# EAGLE board deflectorshield (EAGLE 7.7.0)
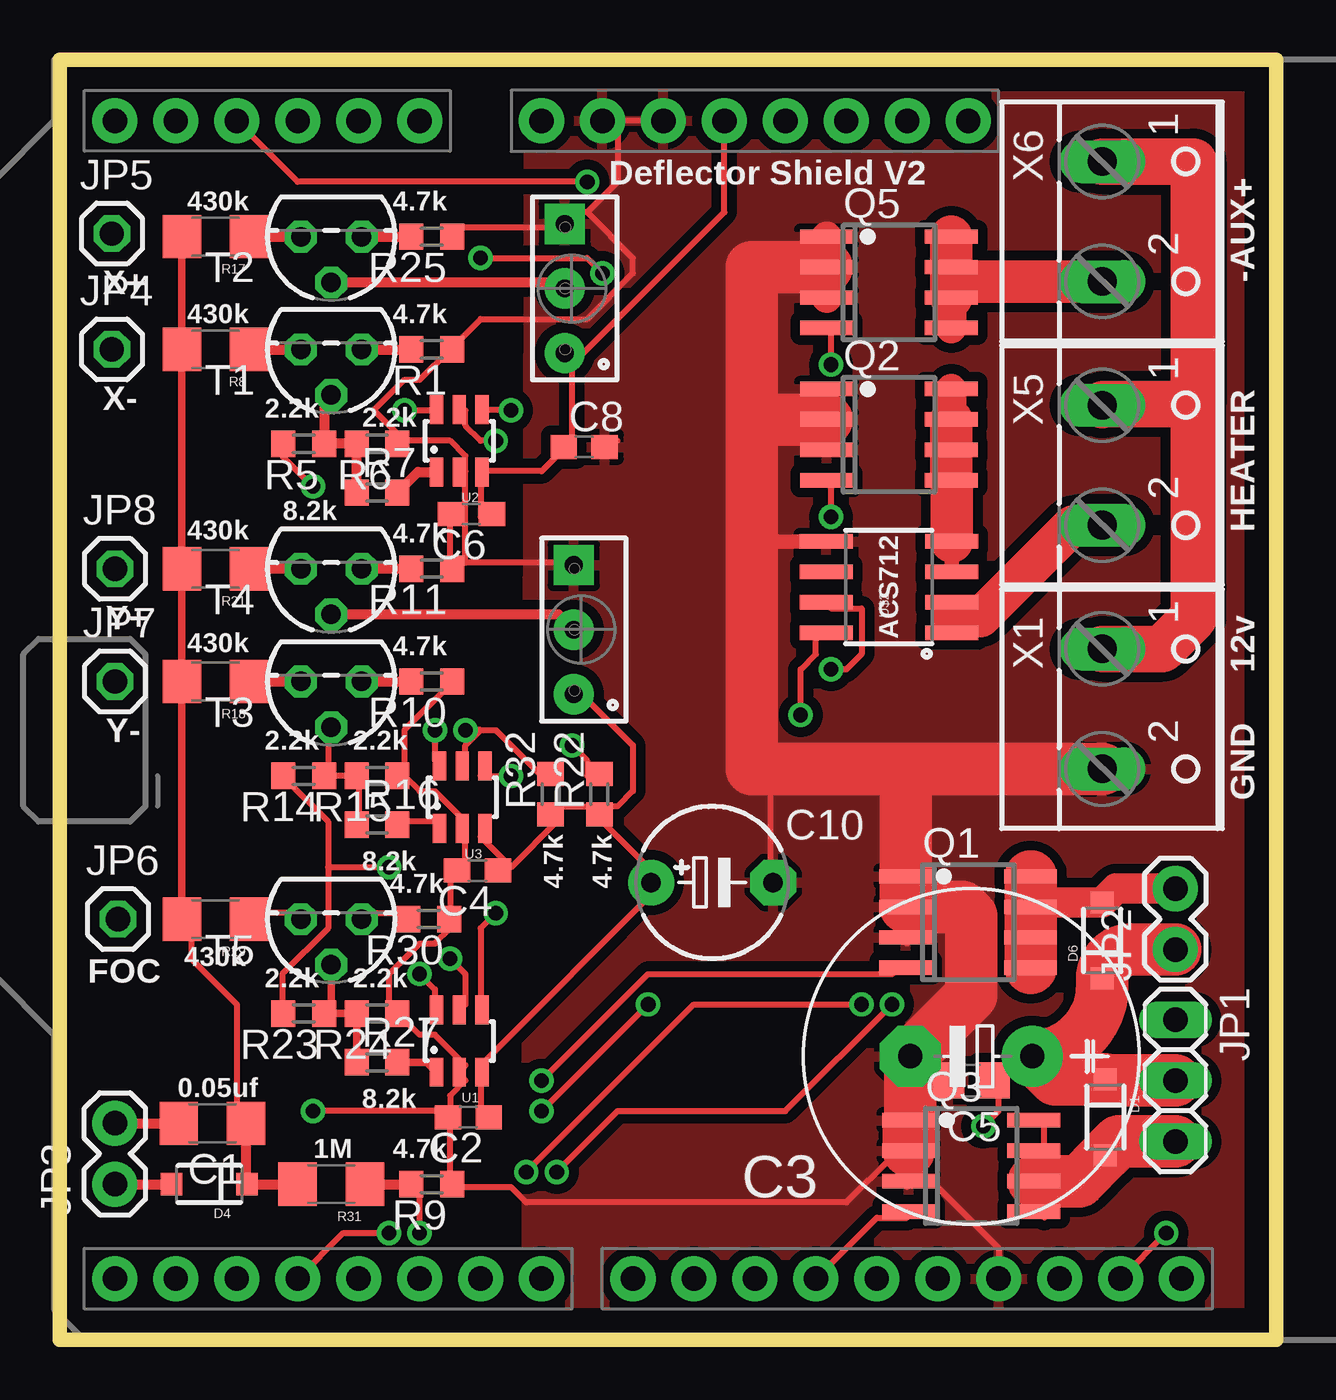
[diagram p0: board, top side]
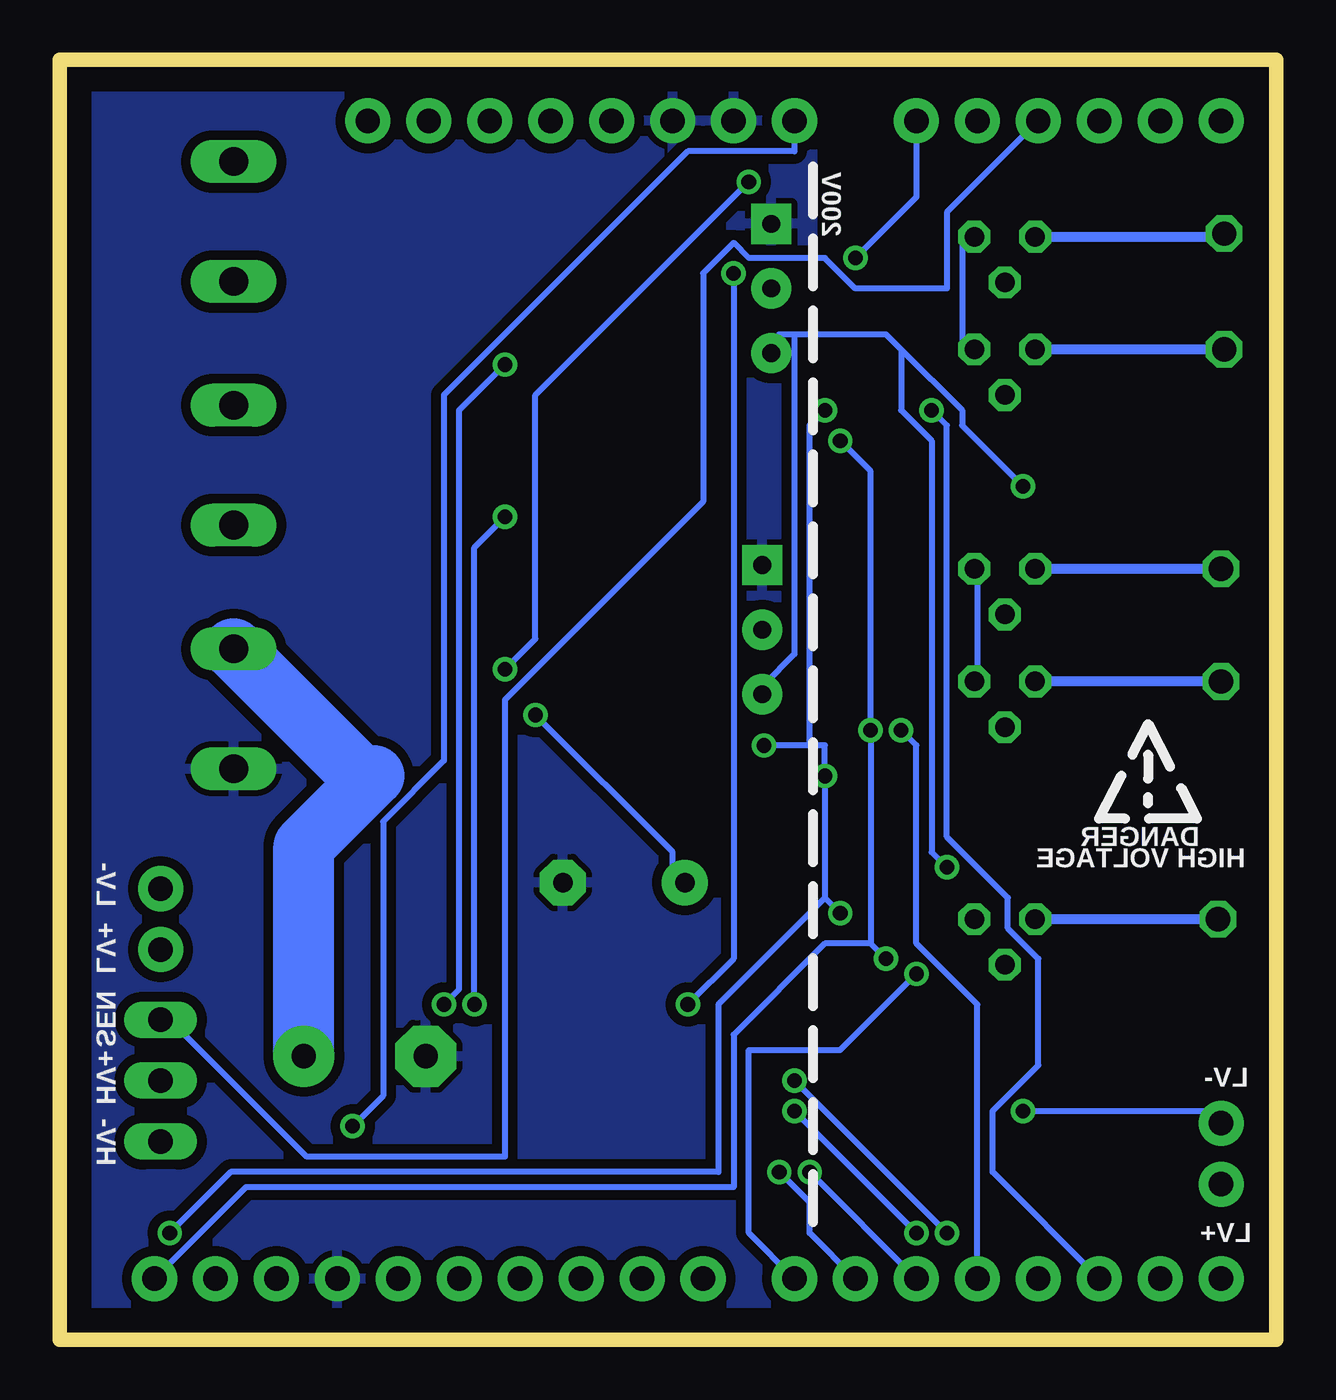
[diagram p1: board, bottom side, seen from below]

Size 50.67 x 53.34 mm. Coordinates in mm from the lower left corner, seen from the top.
Outline: 0,53.34 0,0 50.67,0 50.67,53.34 0,53.34
Copper layers (1*16): Top 0.035mm / dielectric 1.5mm / Bottom 0.035mm
Design rules "default": minimum track width 10mil, minimum drill 24mil, track to track 8mil, track to pad 8mil, pad to pad 8mil, via to via 8mil, smd to smd 8mil, copper to edge 40mil, drill to drill 8mil, minimum pad ring 10mil, minimum via ring 8mil, stop-mask expansion 4mil, vias tented up to drill 0mil, thermal gap 10mil
Net classes: 1 med: width 0.254 mm, clearance 1.27 mm; 2 hv: width 0.254 mm, clearance 3.81 mm

## Footprints (pad centres in the part's own frame; a part is rotated, then mirrored left to right if it is on the bottom)
C1206 = smd 1.6 x 1.8: 1 -1.4,0; 2 1.4,0
C0603 = smd 1.1 x 1: 1 -0.85,0; 2 0.85,0
E5-13 = drill 1.016 pad 2.54: + -2.54,0 | drill 1.016 pad 2.54 octagon: - 2.54,0
C0805 = smd 1.3 x 1.5: 1 -0.95,0; 2 0.95,0
E5-6 = drill 0.813 pad 1.905: + -2.54,0 | drill 0.813 pad 1.905 octagon: - 2.54,0
SOD-123 = smd 0.9 x 0.95: A 1.575,0; C -1.575,0
UNO_R3_SHIELD_NOLABELS = drill 1.016 pad 1.88: 3.3V 50.8,26.67; 5V 50.8,29.21; A0 50.8,41.91; A1 50.8,44.45; A2 50.8,46.99; A3 50.8,49.53; A4 50.8,52.07; A5 50.8,54.61; AREF 2.54,15.24; D2 2.54,49.53; D3 2.54,46.99; D4 2.54,44.45; D5 2.54,41.91; D6 2.54,39.37; D7 2.54,36.83; D8 2.54,33.02; D9 2.54,30.48; D10 2.54,27.94; D11 2.54,25.4; D12 2.54,22.86; D13 2.54,20.32; GND@0 50.8,31.75; GND@1 50.8,34.29; GND@2 2.54,17.78; IOREF 50.8,21.59; NC 50.8,19.05; RES 50.8,24.13; RX 2.54,54.61; SCL 2.54,10.16; SDA 2.54,12.7; TX 2.54,52.07; VIN 50.8,36.83
1X03 = drill 1.016 long: 1 -2.54,0; 2 0,0; 3 2.54,0
1X02 = drill 1.016 pad 1.88: 1 0,0; 2 2.54,0
1X01 = drill 1.016 octagon: 1 0,0
SO-08 = smd 0.6 x 2.2: 1 -1.905,-2.6; 2 -0.635,-2.6; 3 0.635,-2.6; 4 1.905,-2.6; 5 1.905,2.6; 6 0.635,2.6; 7 -0.635,2.6; 8 -1.905,2.6
R0603 = smd 1 x 1.1: 1 -0.85,0; 2 0.85,0
TRIMPOT_PTH_S3_LOCK = drill 0.737 pad 1.676 square: 1 -2.692,-0.305 | drill 0.737 pad 1.676: 2 0,-0.305; 3 2.692,-0.305
1206 = smd 1.6 x 1.8: 1 -1.4,0; 2 1.4,0
TO92 = drill 0.813 octagon: 1 1.27,0; 2 0,1.905; 3 -1.27,0
SOT23-6 = smd 0.55 x 1.2: 1 0.95,1.3; 2 0,1.3; 3 -0.95,1.3; 4 -0.95,-1.3; 5 0,-1.3; 6 0.95,-1.3
SO08 = smd 0.61 x 2.21: 1 -1.905,-2.616; 2 -0.635,-2.616; 3 0.635,-2.616; 4 1.905,-2.616; 5 1.905,2.616; 6 0.635,2.616; 7 -0.635,2.616; 8 -1.905,2.616
W237-102 = drill 1.194 long: 1 -2.5,-1.27; 2 2.5,-1.27

## Placement (x,y rotation side)
C1  0.05uf  [C1206]  6.35,9.02 180 top
C2  [C0603]  17.02,9.27 180 top
C3  [E5-13]  37.97,11.81 180 top
C4  [C0603]  17.4,19.56 180 top
C5  [C0805]  37.97,10.79 180 top
C6  [C0603]  17.14,34.42 180 top
C8  [C0603]  21.84,37.21 0 top
C10  [E5-6]  27.18,19.05 0 top
D1  [SOD-123]  43.56,9.27 270 top
D4  [SOD-123]  6.22,6.48 180 top
D6  [SOD-123]  43.43,16.64 90 top
J1  ARDUINO_R3_SHIELDNOLABELS  [UNO_R3_SHIELD_NOLABELS]  56.9,0 90 top
JP1  [1X03]  46.48,10.79 270 top
JP2  [1X02]  46.48,16.26 90 top
JP3  [1X02]  2.29,6.48 90 top
JP4  [1X01]  2.16,41.27 0 top
JP5  [1X01]  2.16,46.1 0 top
JP6  [1X01]  2.41,17.53 0 top
JP7  [1X01]  2.29,27.43 0 top
JP8  [1X01]  2.29,32.13 0 top
Q1  [SO-08]  37.85,17.4 270 top
Q2  [SO-08]  34.54,37.72 270 top
Q3  [SO-08]  37.97,7.24 270 top
Q5  [SO-08]  34.54,44.07 270 top
R1  4.7k  [R0603]  15.49,41.27 180 top
R4  5k  [TRIMPOT_PTH_S3_LOCK]  21.34,43.82 270 top
R5  2.2k  [R0603]  10.16,37.34 180 top
R6  2.2k  [R0603]  13.21,37.34 180 top
R7  8.2k  [R0603]  13.21,35.31 0 top
R8  430k  [1206]  6.48,41.27 180 top
R9  4.7k  [R0603]  15.49,6.48 180 top
R10  4.7k  [R0603]  15.49,27.43 180 top
R11  4.7k  [R0603]  15.49,32.13 180 top
R13  5k  [TRIMPOT_PTH_S3_LOCK]  21.72,29.59 270 top
R14  2.2k  [R0603]  10.16,23.49 180 top
R15  2.2k  [R0603]  13.21,23.49 180 top
R16  8.2k  [R0603]  13.21,21.46 0 top
R17  430k  [1206]  6.48,45.97 180 top
R18  430k  [1206]  6.48,27.43 180 top
R21  430k  [1206]  6.48,32.13 180 top
R22  4.7k  [R0603]  22.48,22.73 90 top
R23  2.2k  [R0603]  10.16,13.59 180 top
R24  2.2k  [R0603]  13.21,13.59 180 top
R25  4.7k  [R0603]  15.49,45.97 180 top
R27  8.2k  [R0603]  13.21,11.56 0 top
R29  430k  [1206]  6.48,17.53 180 top
R30  4.7k  [R0603]  15.37,17.53 180 top
R31  1M  [1206]  11.3,6.48 180 top
R32  4.7k  [R0603]  20.45,22.73 90 top
T1  2N5088  [TO92]  11.3,41.27 180 top
T2  2N5088  [TO92]  11.3,45.97 180 top
T3  2N5088  [TO92]  11.3,27.43 180 top
T4  2N5088  [TO92]  11.3,32.13 180 top
T5  2N5088  [TO92]  11.3,17.53 180 top
U1  MCP4725  [SOT23-6]  16.64,12.45 180 top
U2  MCP4725  [SOT23-6]  16.64,37.47 180 top
U3  MCP4725  [SOT23-6]  16.76,22.61 180 top
U$2  ACS712  [SO08]  34.54,31.37 90 top
X1  [W237-102]  44.7,26.29 270 top
X5  [W237-102]  44.7,36.45 270 top
X6  [W237-102]  44.7,46.61 270 top

## Library data of the parts
C1 = eagle-ltspice; SPICEMODEL: NONE; SPICEPREFIX: C
C2-C4 C6 C8 C10 R1 R5-R7 R9-R11 R14-R16 R22-R25 R27 R30 R32 = rcl
C5 = resistor
D1 D4 D6 = SparkFun-DiscreteSemi
J1 = SparkFun-Boards
JP1 JP4-JP8 = pinhead
JP2 JP3 = SparkFun-Connectors
Q1-Q3 Q5 = transistor-power
R4 R13 = SparkFun-Electromechanical
R8 R17 R18 R21 R29 R31 = SparkFun-Resistors
T1-T5 = transistor
U1-U3 = SparkFun-AnalogIC; PROD_ID: IC-08886
U$2 = SparkFun-AnalogIC; PROD_ID: IC-08964
X1 X5 X6 = con-wago-500; MPN: 237-102; OC_FARNELL: unknown; OC_NEWARK: 70K9898

## Nets
+5V: C2.1 C4.1 C6.1 C8.1 C10.+ J1.5V R4.3 R5.2 R13.3 R14.2 R22.1 R23.2 R32.1 U1.3 U2.3 U3.3 U$2.8
+12V: C3.+ C5.1 D1.C D6.C J1.VIN JP1.2 JP2.1 X1.1 X5.1 X6.1
GND: C1.2 C2.2 C3.- C4.2 C5.2 C6.2 C8.2 C10.- J1.GND@0 J1.GND@1 J1.GND@2 JP3.2 Q1.1 Q1.2 Q1.3 Q2.1 Q2.2 Q2.3 Q3.1 Q3.2 Q3.3 Q5.1 Q5.2 Q5.3 R1.1 R4.1 R6.1 R9.1 R10.1 R11.1 R13.1 R15.1 R24.1 R25.1 R30.1 U1.2 U2.2 U3.2 U$2.5 X1.2
N$1 [med]: JP4.1 R8.1 T1.1
N$2 [med]: JP5.1 R17.1 T2.1
N$3: R7.2 U2.1
N$4: R1.2 R25.2 T1.3 T2.3
N$5: R4.2 T2.2
N$6: R13.2 T4.2
N$7: R30.2 T5.3
N$8: R5.1 R6.2 R7.1 T1.2
N$10: J1.D3 Q1.4
N$11: R10.2 R11.2 T3.3 T4.3
N$13: J1.SDA R22.2 U1.4 U2.4 U3.4
N$14: R14.1 R15.2 R16.1 T3.2
N$15 [med]: JP8.1 R21.1 T4.1
N$16 [med]: JP7.1 R18.1 T3.1
N$17: R16.2 U3.1
N$18: J1.D2 U2.6
N$19: J1.D4 U3.6
N$20: J1.A0 R9.2 R31.1
N$21: D6.A JP2.2 Q1.5 Q1.6 Q1.7 Q1.8
N$23: Q2.5 Q2.6 Q2.7 Q2.8 U$2.3 U$2.4
N$24: U$2.1 U$2.2 X5.2
N$25: J1.D5 Q2.4
N$26: D1.A JP1.3 Q3.5 Q3.6 Q3.7 Q3.8
N$32: D4.A JP3.1
N$33: R23.1 R24.2 R27.1 T5.2
N$34: R27.2 U1.1
N$35: J1.SCL R32.2 U1.5 U2.5 U3.5
N$36: JP6.1 R29.1 T5.1
N$38: J1.D11 Q3.4
N$40: J1.A2 JP1.1
N$41 [med]: Q5.5 Q5.6 Q5.7 Q5.8 X6.2
N$42: J1.D6 Q5.4
N$43: J1.A3 U$2.7
N$45: J1.D7 U1.6
VCCINT [med]: C1.1 D4.C R8.2 R17.2 R18.2 R21.2 R29.2 R31.2

## Tracks (layer width: path | path; a pad name or v marks a point on that pad's centre or on a via)
+5V  (via drill 0.61)
  Top 0.254: 18.8,19.69 20.7,21.59 R32.1 20.7,22.23 21.97,22.23 R22.1 | 18.8,19.69 17.53,20.95 U3.3 | 18.8,19.69 C4.1 | C2.1 17.53,9.53 17.53,10.79 U1.3 17.53,11.43 25.15,19.05 | v30.86,26.03 30.86,27.94 31.5,28.58 31.5,29.21 U$2.8 | 25.15,19.05 22.61,21.59 R22.1 | 25.15,19.05 C10.+ 24.51,19.05 | 11.18,19.69 11.18,21.59 9.27,23.49 R14.2 | 11.18,19.69 11.18,17.15 9.27,15.24 9.27,13.97 R23.2 | 17.53,36.2 17.53,34.29 C6.1 | v10.54,35.56 9.27,36.83 R5.2 | 21.34,40.64 21.34,37.47 C8.1 20.7,36.83 20.07,36.2 17.53,36.2 | 17.53,36.2 U2.3 | J1.5V 27.69,46.99 21.34,40.64 | 21.34,40.64 R4.3 | v13.72,19.69 11.18,19.69 | R22.1 22.61,22.23 23.24,22.23 23.88,22.86 23.88,24.77 21.97,26.67 R13.3
  Bottom 0.254: v30.86,26.03 25.15,20.32 25.15,19.05 C10.+ | v10.54,35.56 13.08,38.1 13.08,38.73 15.62,41.27 | 15.62,41.27 16.26,41.91 20.07,41.91 | 20.07,41.91 20.7,41.91 20.7,41.27 R4.3 | 20.07,41.91 20.07,28.58 21.34,27.3 R13.3 | v13.72,19.69 14.35,20.32 14.35,37.47 15.62,38.73 15.62,41.27
+12V  (via drill 0.61)
  Top 0.254: 39.12,10.79 39.75,11.43 C3.+ | 39.12,10.79 39.12,9.53 v38.48,8.89 | 39.12,10.79 C5.1
  Top 1.93: X1.1 45.93,28.79 47.24,30.1 47.24,38.99 | 47.24,38.99 43.47,38.99 X5.1 | X6.1 47.24,49.11 47.24,38.99
  Top 2.184: JP1.2 43.61,10.79 D1.C 41.48,10.85 C3.+ arc90 43.43,14.73 D6.C arc-90 44.63,16.26 JP2.1
  Bottom 0.254: v38.48,8.89 37.21,10.16 37.21,21.59 34.67,24.13 34.67,39.37 24.51,49.53 20.07,49.53 J1.VIN
  Bottom 2.54: C3.+ 40.51,20.57 37.59,23.49 38.14,23.49 X1.1
GND  (via drill 0.61)
  Top 0.254: Q2.3 32,37.08 32,37.4 Q2.2 32,39.31 32,39.62 Q2.1 | R25.1 16.26,46.36 20.7,46.36 R4.1 21.34,46.99 21.97,46.99 | J1.GND@0 23.24,50.8 | 21.97,46.99 23.24,48.26 23.24,50.8 | 23.24,50.8 J1.GND@1 | 14.35,37.47 16.26,37.47 16.89,36.83 16.89,36.2 | 16.26,41.27 14.99,40.01 14.35,40.01 13.08,38.73 14.35,37.47 | 14.35,37.47 R6.1 | 16.26,32.39 16.26,34.29 C6.2 | 16.89,32.39 21.34,32.39 R13.1 21.97,32.39 | 16.89,32.39 16.26,32.39 | 16.26,32.39 R11.1 | 16.89,32.39 16.89,36.2 | 16.89,36.2 U2.2 | 21.97,46.99 23.88,45.09 23.88,44.45 21.97,42.55 17.53,42.55 16.26,41.27 | 16.26,41.27 R1.1 | 14.35,23.49 14.35,25.4 16.26,27.3 R10.1 | 14.35,23.49 14.99,22.86 15.62,22.86 16.89,21.59 U3.2 16.89,20.95 16.89,19.69 C4.2 16.26,19.69 16.26,17.78 R30.1 16.26,17.15 15.62,16.51 14.99,16.51 13.72,15.24 13.72,13.97 R24.1 14.35,13.33 14.99,12.7 15.62,12.7 16.89,11.43 U1.2 16.89,10.79 16.26,10.16 16.26,9.53 C2.2 | 14.35,23.49 R15.1 | C2.2 16.26,8.89 16.26,6.98 R9.1 16.26,6.35 18.8,6.35 19.43,5.71 32.77,5.71 34.67,7.62 Q3.2 | v10.54,9.53 15.62,9.53 C2.2 | 23.24,37.47 C8.2 | 29.02,44.51 28.96,44.45 28.83,44.45 | C5.2 35.94,10.79 C3.- | Q3.3 35.31,6.35 35.31,6.98 Q3.2 | Q1.3 35.31,16.51 35.31,18.03 | J1.GND@2 39.12,3.81 35.94,6.98 Q3.2 | 29.59,23.79 29.59,19.05 C10.-
  Top 0.406: JP3.2 C1.2
  Top 0.61: U$2.5 29.46,33.27 29.46,32.64 28.83,32.64 28.83,33.91
  Top 1.27: 29.4,44.76 29.46,44.7 | 28.77,44.76 29.02,44.51 29.46,44.07 | Q5.3 Q5.2 Q5.1
  Top 2.184: X1.2 35.81,23.79 | 35.81,23.79 29.59,23.79 28.83,23.79 28.83,33.91 28.83,38.35 | 28.83,38.35 28.83,44.45 28.83,44.7 29.46,44.7 Q5.2 | Q2.2 28.83,38.35 | Q3.2 Q3.1 35.43,9.2 C3.- 37.97,14.35 37.97,17.65 37.59,18.03 35.31,18.03 Q1.2 Q1.1 35.25,23.22 35.81,23.79
  Bottom 0.254: v10.54,9.53 2.29,9.53 JP3.2
  pour Top (isolate 0.406): 19.43,-0.63 19.56,54.99 56.64,54.99 56.52,-14.48
  pour Bottom (isolate 0.406): 19.05,-1.27 19.3,-1.02 19.3,7.75 19.3,56.39 20.83,57.91 51.18,57.91 54.48,54.61 54.48,-12.7 56.52,-14.73 32.51,-14.73
N$1
  Top 0.406: R8.1 T1.1
  Bottom 0.406: JP4.1 T1.1
N$2
  Top 0.406: R17.1 T2.1
  Bottom 0.406: T2.1 2.29,45.97 JP5.1
N$3
  Top 0.406: R7.2 14.92,36.16 U2.1
N$4
  Top 0.406: T2.3 R25.2 | T1.3 R1.2
  Bottom 0.254: T1.3 13.08,41.27 13.08,45.72 T2.3
N$5
  Top 0.406: T2.2 20.78,44.07 R4.2
N$6
  Top 0.406: R13.2 20.78,30.23 T4.2
N$7
  Top 0.254: R30.2 14.35,17.78 13.08,17.78 T5.3
N$8
  Top 0.406: T1.2 11.01,39.08 R5.1 R6.2 R7.1
N$10  (via drill 0.61)
  Top 0.254: v20.07,10.79 24.51,15.24 34.67,15.24 Q1.4 | v13.72,4.45 11.81,4.45 J1.D3
  Bottom 0.254: v13.72,4.45 v20.07,10.79
N$11
  Top 0.406: T4.3 R11.2 | T3.3 R10.2
  Bottom 0.254: T3.3 12.45,27.94 12.45,31.75 T4.3
N$13  (via drill 0.61)
  Top 0.254: v21.34,24.77 21.97,24.13 21.97,23.49 R22.2 | v18.8,23.49 17.53,23.49 U3.4 | v18.16,17.78 17.53,17.15 17.53,13.97 U1.4 | v18.8,38.73 17.53,38.73 U2.4 | v46.1,4.45 J1.SDA
  Bottom 0.254: 19.43,24.77 18.8,24.77 v18.8,23.49 18.8,18.41 | 19.43,24.77 v21.34,24.77 | 18.8,18.41 v18.16,17.78 | v18.8,38.73 19.43,38.1 19.43,24.77 | v46.1,4.45 43.56,6.98 23.24,6.98 23.24,13.97 18.8,18.41
N$14
  Top 0.254: R16.1 12.45,21.59 12.45,23.49 R15.2 11.18,23.49 | 11.18,23.49 11.18,25.4 T3.2 | 11.18,23.49 R14.1
N$15
  Top 0.406: R21.1 T4.1
  Bottom 0.406: T4.1 JP8.1
N$16
  Top 0.406: R18.1 T3.1
  Bottom 0.406: JP7.1 T3.1
N$17
  Top 0.254: R16.2 14.35,21.59 15.62,21.59 U3.1
N$18  (via drill 0.61)
  Top 0.254: v14.35,38.73 15.62,38.73 U2.6
  Bottom 0.254: v14.35,38.73 13.72,38.1 13.72,20.95 11.18,18.41 11.18,17.15 9.91,15.87 9.91,11.43 11.81,9.53 11.81,6.98 J1.D2
N$19  (via drill 0.61)
  Top 0.254: v15.62,25.4 15.62,24.13 U3.6
  Bottom 0.254: v15.62,25.4 14.99,24.77 14.99,16.51 12.45,13.97 J1.D4
N$20  (via drill 0.61)
  Top 0.254: v14.99,4.45 14.99,6.35 R9.2 | v24.51,13.97 v20.07,9.53 | v22.61,44.45 21.97,45.09 v17.53,45.09
  Top 0.406: R31.1 R9.2
  Bottom 0.254: v20.07,9.53 v14.99,4.45 | v24.51,13.97 22.61,15.87 v22.61,44.45 | v17.53,45.09 14.99,47.62 J1.A0
N$21
  Top 1.27: Q1.7 40.62,18.21 D6.A 44.02,18.8 JP2.2
  Top 2.184: Q1.8 Q1.7 Q1.6 Q1.5
N$23
  Top 0.61: U$2.4 U$2.3
  Top 1.27: Q2.7 Q2.8
  Top 1.778: Q2.7 Q2.6 Q2.5 37.16,35.81 U$2.4
N$24
  Top 0.61: U$2.2 37.16,30.1 U$2.1
  Top 1.676: X5.2 42.2,33.95 38.35,30.1 37.16,30.1
N$25  (via drill 0.61)
  Top 0.254: v32.13,34.29 32.13,35.56 Q2.4 | v33.4,13.97 26.42,13.97 v19.43,6.98
  Bottom 0.254: v32.13,34.29 33.4,33.02 v33.4,13.97 | J1.D5 v19.43,6.98
N$26
  Top 0.254: Q3.5 41.02,5.08 41.02,6.6 41.02,7.62 | 41.02,7.62 41.02,8.89 Q3.8 | 41.02,7.62 Q3.7
  Top 2.184: JP1.3 44.12,8.26 D1.A 42.47,6.6 41.02,6.6 Q3.6
N$32
  Top 0.406: JP3.1 D4.A
N$33
  Top 0.305: T5.2 11.3,13.88 R23.1 R24.2 R27.1
N$34
  Top 0.305: R27.2 15.28,11.56 U1.1
N$35  (via drill 0.61)
  Top 0.254: 17.53,25.4 18.16,25.4 20.07,23.49 R32.2 | 17.53,25.4 16.89,24.77 16.89,24.13 U3.5 | v16.26,15.87 16.89,15.24 16.89,13.97 U1.5 | 17.53,25.4 v16.89,25.4 | v18.16,37.47 17.53,37.47 16.89,38.1 16.89,38.73 U2.5
  Bottom 0.254: 16.89,16.51 v16.26,15.87 | 16.89,16.51 v16.89,25.4 16.89,36.2 v18.16,37.47 | J1.SCL 42.93,6.35 22.61,6.35 22.61,12.7 18.8,16.51 16.89,16.51
N$36
  Top 0.254: R29.1 8,17.78 9.91,17.78 T5.1
  Bottom 0.406: T5.1 JP6.1
N$38
  Top 0.254: J1.D11 34.04,5.08 35.31,5.08 Q3.4
N$40
  Bottom 0.254: J1.A2 13.72,46.99 13.72,43.82 17.53,43.82 18.8,45.09 21.97,45.09 22.61,45.72 23.88,44.45 23.88,34.93 32.13,26.67 32.13,7.62 40.39,7.62 46.1,13.33 JP1.1
N$41
  Top 1.27: Q5.6 Q5.5
  Top 1.778: X6.2 37.14,44.11 | 37.14,44.11 Q5.7 Q5.8 | 37.14,44.11 Q5.6
N$42  (via drill 0.61)
  Top 0.254: v32.13,40.64 32.13,41.91 Q5.4 | v34.67,13.97 30.23,9.53 23.24,9.53 v20.7,6.98
  Bottom 0.254: v32.13,40.64 34.04,38.73 34.04,14.6 v34.67,13.97 | v20.7,6.98 19.43,5.71 19.43,4.45 J1.D6
N$43  (via drill 0.61)
  Top 0.254: J1.A3 9.91,48.26 v21.97,48.26 | v32.13,27.94 32.77,27.94 33.4,28.58 33.4,30.48 32.13,30.48 U$2.7
  Bottom 0.254: v21.97,48.26 30.86,39.37 30.86,29.21 v32.13,27.94
N$45  (via drill 0.61)
  Top 0.254: v14.99,15.24 15.62,14.6 15.62,13.97 U1.6
  Bottom 0.254: v14.99,15.24 18.16,12.06 21.97,12.06 21.97,4.45 J1.D7
VCCINT
  Top 0.254: C1.1 7.37,9.53 7.37,13.97 5.46,15.87 5.46,17.15 R29.2
  Top 0.305: R17.2 R8.2 R21.2 R18.2 R29.2
  Top 0.406: R31.2 D4.C 7.75,6.53 C1.1

## Text on the board
_tsilk: 430k | 4.7k | Deflector Shield V2 | X+ | -AUX+ | 430k | 4.7k | X- | 2.2k | 2.2k | 430k | 8.2k | 4.7k | HEATER | Y+ | 430k | 4.7k | ACS712 | 12v | Y- | 2.2k | 2.2k | GND | 8.2k | 4.7k | 4.7k | 4.7k | 430k | 2.2k | 2.2k | FOC | 0.05uf | 8.2k | 1M | 4.7k
_bsilk: 200V | DANGER | HIGH VOLTAGE | LV- | LV+ | SEN | LV- | HV+ | HV- | LV+